# Altium PCB Underwater_ROV_PDB_17.PcbDoc
Units mm, origin at the board's own origin, x right, y up, seen from the top; angles counter-clockwise.
Board outline 180.98 x 100.84 mm, 2 copper layers (Top Layer, Bottom Layer), stack 0.325 mm thick; 42 components, 58 nets, 224 pads, 46 vias.
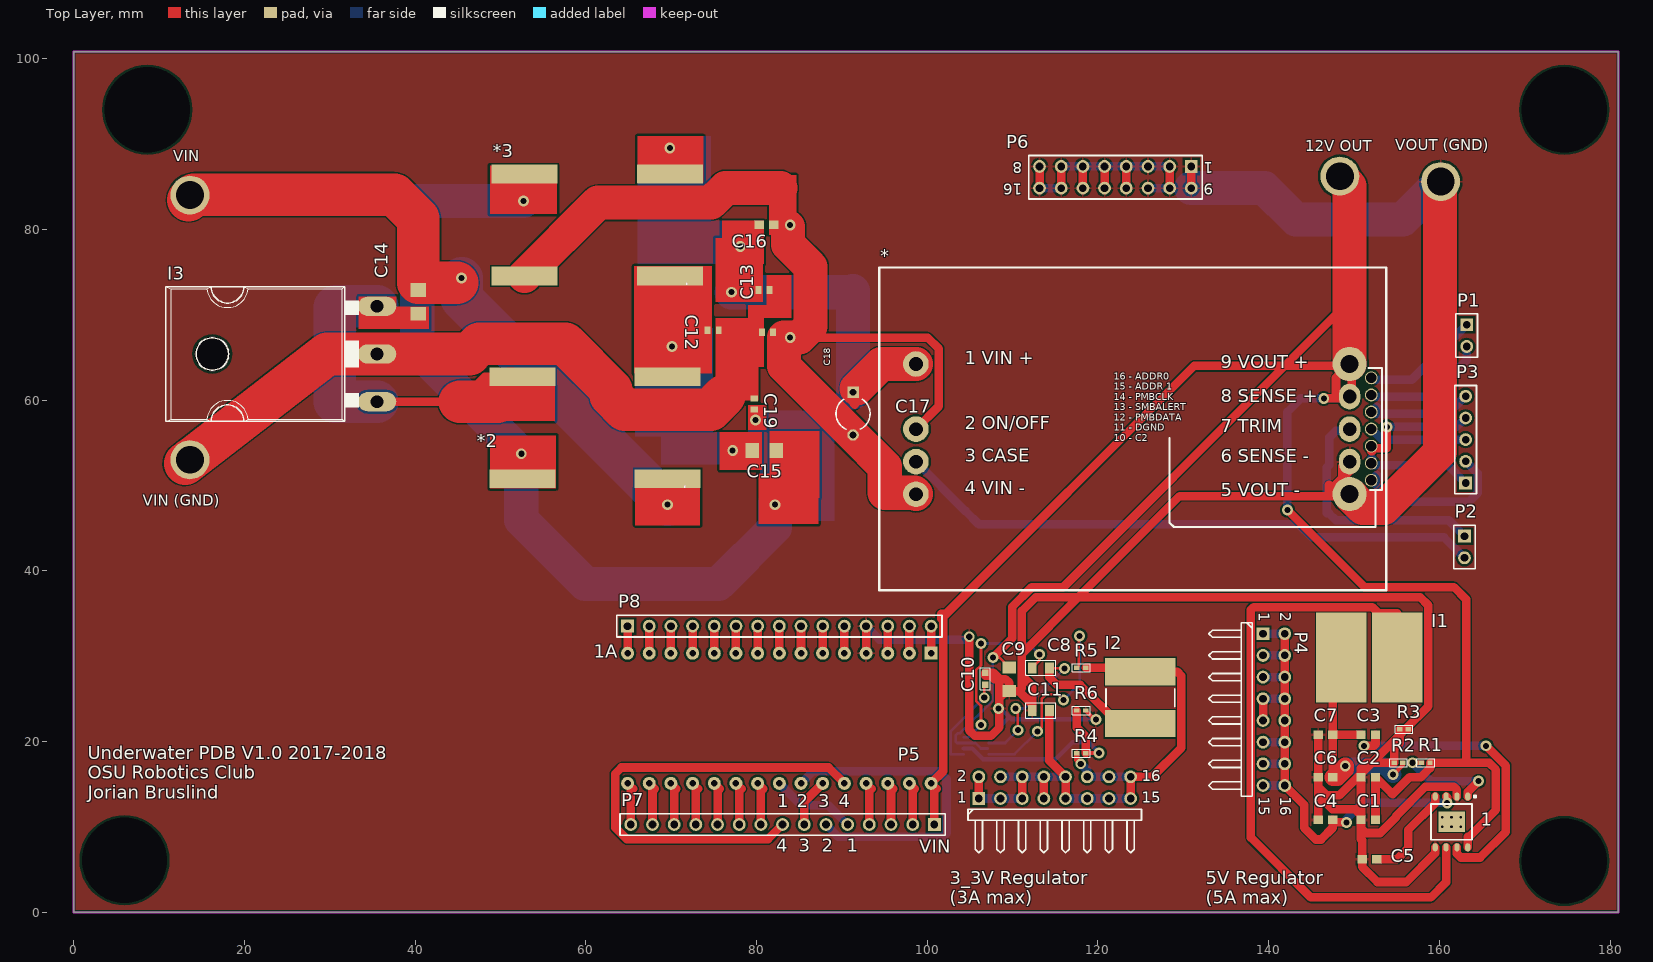
[diagram p0: Top Layer view]
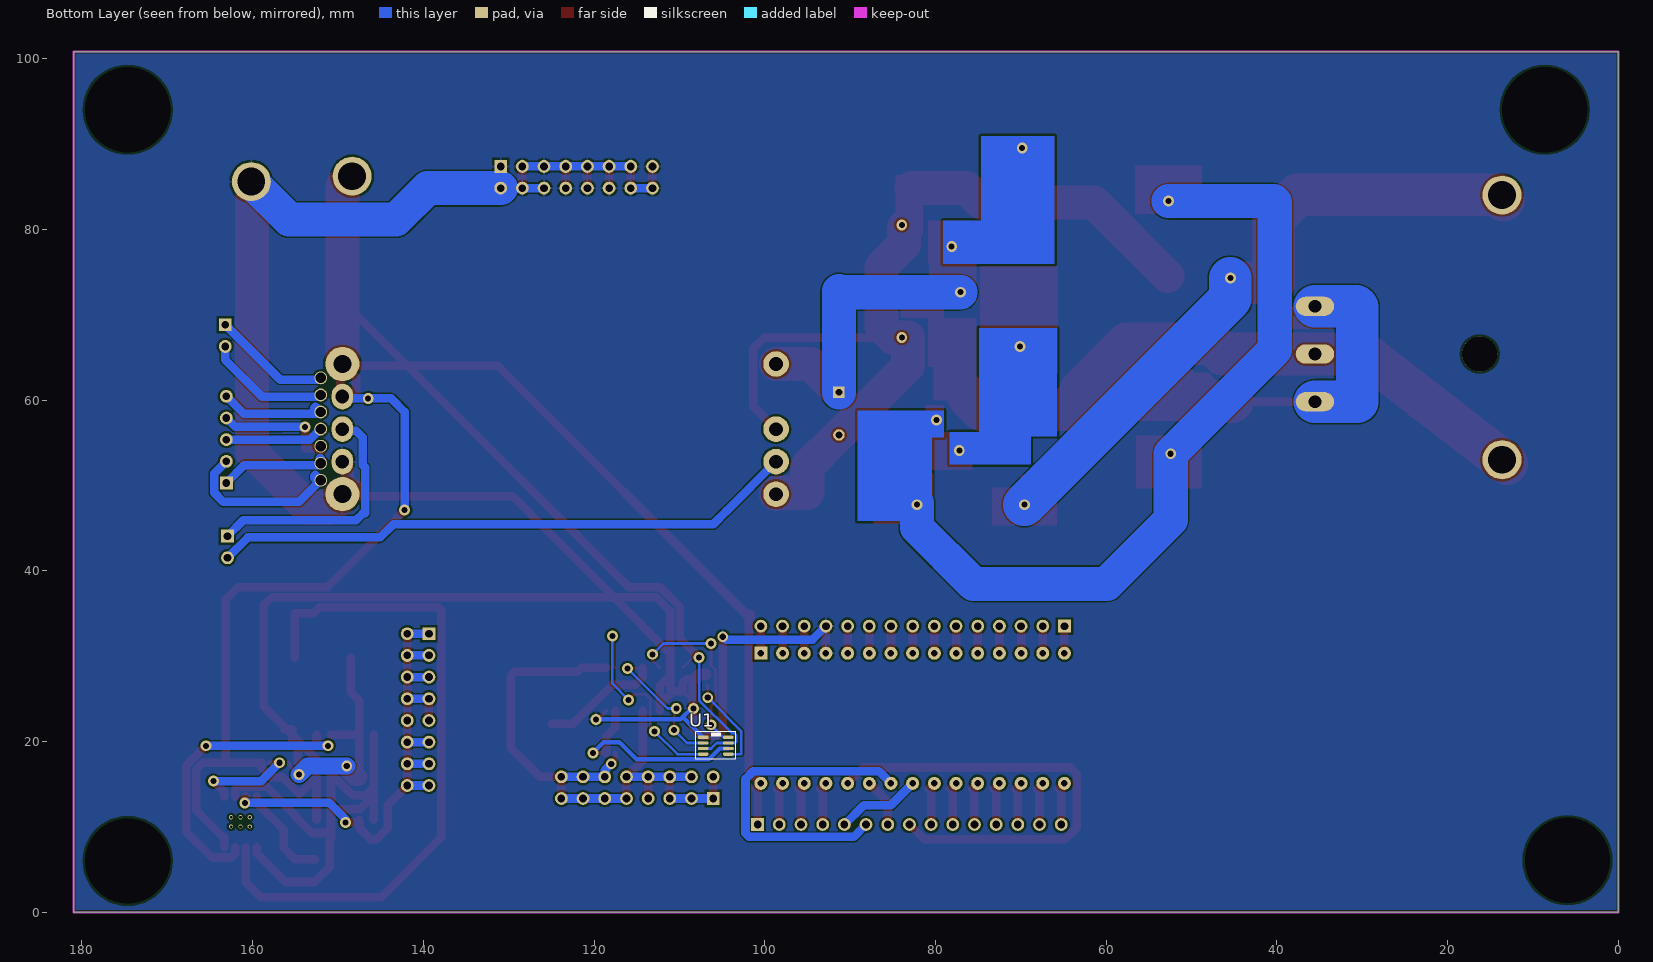
[diagram p1: Bottom Layer view, seen from below]

## Layer stack, top to bottom
Top Solder: solder mask 0.0102, Solder Resist, Dk 3.5
Top Layer: signal copper 0.0356
Dielectric 1: core 0.254, FR-4, Dk 4.2
Bottom Layer: signal copper 0.0356
Bottom Solder: solder mask 0.0102, Solder Resist, Dk 3.5

## Board outline
-0.002,100.838 180.975,100.838 180.975,0 -0.002,0

## Design rules (kind name [scope] priority, off if disabled: settings)
Clearance [All] p1: gap=0.154 ignorepadtopadclearanceinfootprint=TRUE except(0: Arc-Hole Track-Hole SMDPad-Hole THPad-Hole Via-Hole Fill-Hole Poly-Hole Region-Hole Text-Hole; 0.254: THPad-THPad THPad-Via THPad-Fill THPad-Poly THPad-Region THPad-Text Via-Via Via-Fill Via-Poly Via-Region Via-Text Fill-Fill Fill-Poly Fill-Region Fill-Text Poly-Poly Poly-Region Poly-Text Region-Region Region-Text Text-Text)
PolygonConnect [All] p1: connectstyle=Relief reliefconductorwidth=0.254 reliefentries=4 polygonreliefangle="90 Angle" airgapwidth=0.254
RoomDefinition "Current sensing" [InComponentClass('Current sensing')] p1: confinementstyle=ConfineIn formatcopy=TRUE lockcomponents=FALSE outline 58.547,35.941 58.547,6.223 102.743,6.223 102.743,35.941
RoomDefinition "12V Regulator" [InComponentClass('12V Regulator')] p2: confinementstyle=ConfineIn formatcopy=TRUE lockcomponents=FALSE outline 1.524,35.941 168.656,35.941 168.656,91.331 1.524,91.331
RoomDefinition "5V Regulator" [InComponentClass('5V Regulator')] p3: confinementstyle=ConfineIn formatcopy=TRUE lockcomponents=FALSE outline 168.529,35.941 132.251,35.941 132.251,1.016 168.529,1.016
RoomDefinition "3_3V Regulator" [InComponentClass('3_3V Regulator')] p4: confinementstyle=ConfineIn formatcopy=TRUE lockcomponents=FALSE outline 102.616,0.508 132.334,0.508 132.334,36.068 102.616,36.068
RoutingVias [All] p1: holewidth=0.711 width=1.27 viastyle="Through Hole" minholewidth=0.711 minwidth=1.27 maxholewidth=0.711 maxwidth=1.27
SolderMaskExpansion [All] p1: expansion=0.102
Width [All] p1: maxlimit=600 minlimit=0.3 preferedwidth=1 minimp=50.000000 maximp=50.000000 favimp=50.000000
30 further rules are at their usual default settings.

## Classes and differential pairs
component class "Current sensing": P8
component class "3_3V Regulator": C8 C9 C10 C11 I2 P5 R4 R5 R6 U1
component class "5V Regulator": 1 C1 C2 C3 C4 C5 C6 C7 I1 P4 R1 R2 R3
component class "12V Regulator": * *2 *3 C12 C13 C14 C15 C16 C17 C18 C19 I3 P1 P2 P3 P6 U2

## Components (designator, comment, footprint, x,y, rotation, side; value= is the part's Value field where it differs from the comment)
1 "TPS54627DDA" SOIC127P600X170_HS-9N 159.512,7.62 r270 top
1A "arduinoNano" "Arduino nano" 104.521,31.877 r180 top
* "Q48SC12033" PCBComponent_1 94.379,37.73 r0 top
*2 "PA2755NL" Makeni 61.087,56.769 r180 top
*3 "PA2755NL" Makeni 61.341,80.518 r180 top
C1 "CAP-11378" 0603 151.663,10.827 r180 top
C2 "CAP-11378" 0603 151.663,15.827 r180 top
C3 "100nF" 0603 151.663,20.827 r180 top
C4 "10.0uF" 0603 146.663,10.827 r180 top
C5 "100nF" 0603 151.787,6.223 r180 top
C6 "15.0pF" 0603 146.663,15.827 r180 top
C7 "CAP-11378" 0603 146.663,20.827 r180 top
C8 "100nF" 0805C-TBD 112.539,28.64 r0 top
C9 "10uF" EIA3216 109.601,27.305 r90 top
C10 "8.2nF" 0603C-GENERIC 106.807,26.67 r90 top
C11 "47uF" 0805C-TBD 112.539,23.64 r0 top
C12 "47nF" 0402-CAP 74.93,68.199 r180 top
C13 "47nF" 0402-CAP 80.899,72.898 r180 top
C14 "6.6uF" 1206 40.386,71.501 r270 top
C15 "6.6uF" 1206 80.899,54.102 r0 top
C16 "2.2uF" 0603 81.153,80.518 r0 top
C17 "Cap2" CAPR5-4X5 91.313,58.42 r270 top value=100pF
C18 "47nF" 0402-CAP 81.28,67.945 r180 top
C19 "47nF" 0402-CAP 79.756,59.563 r90 top
I1 "3.3uH" SRP1040 151.787,29.845 r180 top
I2 "SRN8040-2R2Y" SRN8040 124.968,25.146 r90 top
I3 "VS-65PQ015PBF" TO247AC 16.256,65.405 r90 top
P1 "Header 2" HDR1X2 163.195,68.834 r270 top
P2 "Header 2" HDR1X2 162.941,44.069 r270 top
P3 "Header 5" HDR1X5 163.068,50.292 r90 top
P4 "5V Header" HDR2X8H 139.341,32.639 r270 top
P5 "3_3V Header" HDR2X8H 106.045,13.335 r0 top
P6 "Header 8X2A" HDR2X8_CEN 130.937,87.376 r180 top
P7 "Header 15" HDR1X15 100.838,10.287 r180 top
P8 "Header 15" HDR1X15 64.897,33.528 r0 top
R1 "TBD" 0402R-TBD 158.899,17.526 r180 top
R2 "121k" 0402R-TBD 155.724,17.526 r180 top
R3 "22.1k" 0402R-TBD 156.359,21.463 r180 top
R4 "33.2k" 0402R-TBD 117.539,18.64 r0 top
R5 "100k" 0402R-TBD 117.539,28.64 r0 top
R6 "10.2k" 0402R-TBD 117.539,23.64 r0 top
U1 "TPS563210DDFT" SOT23-8 107.217,20.492 r180 bottom

## Footprints (in the part's own frame and the unit in brackets; to place one, negate y for a bottom-side part, rotate by r counter-clockwise, add the part's x,y. Pads: shape width x height; smd on the part's side, far side on the other; paste and mask are expansions set on the pad)
0402-CAP [mm]
  rect 0.7x0.9 smd: 1(-0.65,0) 2(0.65,0)
0402R-TBD [mil]
  rect 25x20 smd: 1(0,0) 2(40,0)
  silkscreen extent -21,-19 61,19, body extent -6,-10 46,10, height 14
0603 [mm]
  rect 1.1x1 smd: 1(-0.85,0) 2(0.85,0)
0603C-GENERIC [mil] "CAPACITOR 0603"
  rect 30x30 smd: 1(0,0) 2(55,0)
  silkscreen extent -23,-23 78,23, body extent -4,-15 59,15, height 19
0805C-TBD [mil] "CAPACITOR 0805"
  rect 40x50 smd: 1(-10,0) 2(70,0)
  silkscreen extent -40,-35 100,35, body extent -11,-25 70,25, height 26
1206 [mm]
  rect 1.6x1.8 smd: 1(-1.4,0) 2(1.4,0)
"Arduino nano" [mil] "arduino nano"
  rect 60x60 hole 30: 0(160,60)
  round 60 hole 30: 1(260,60) 2(360,60) 3(460,60) 4(560,60) 5(660,60) 6(760,60) 7(860,60) 8(960,60) 9(1060,60) 10(1160,60) 11(1260,60) 12(1360,60) 13(1460,60) 14(1560,60) 15(1560,660) 16(1460,660) 17(1360,660) 18(1260,660) 19(1160,660) 20(1060,660) 21(960,660) 22(860,660) 23(760,660) 24(660,660) 25(560,660) 26(460,660) 27(360,660) 28(260,660) 29(160,660)
CAPR5-4X5 [mm] "Capacitor; 2 Leads"
  rect 1.35x1.35 hole 0.8: 1(-2.5,0)
  round 1.35 hole 0.8: 2(2.5,0)
  silkscreen extent -1.69,-2 1.82,2
EIA3216 [mm]
  rect 1.4x1.6 smd: A(1.4,0) C(-1.4,0)
HDR1X2 [mm] "Connector; Header; 2 Position"
  rect 1.5x1.5 hole 0.9: 1(0,0)
  round 1.5 hole 0.9: 2(2.54,0)
  silkscreen extent -1.27,-1.27 3.81,1.27
HDR1X5 [mm] "Connector; Header; 5 Position"
  rect 1.5x1.5 hole 0.9: 1(0,0)
  round 1.5 hole 0.9: 2(2.54,0) 3(5.08,0) 4(7.62,0) 5(10.16,0)
  silkscreen extent -1.27,-1.27 11.43,1.27
HDR1X15 [mm] "Connector; Header; 15 Position"
  rect 1.5x1.5 hole 0.9: 1(0,0)
  round 1.5 hole 0.9: 2(2.54,0) 3(5.08,0) 4(7.62,0) 5(10.16,0) 6(12.7,0) 7(15.24,0) 8(17.78,0) 9(20.32,0) 10(22.86,0) 11(25.4,0) 12(27.94,0) 13(30.48,0) 14(33.02,0) 15(35.56,0)
  silkscreen extent -1.27,-1.27 36.83,1.27
HDR2X8_CEN [mm] "Connector; Header; 8x2 Position"
  rect 1.5x1.5 hole 0.9: 1(0,0)
  round 1.5 hole 0.9: 2(2.54,0) 3(5.08,0) 4(7.62,0) 5(10.16,0) 6(12.7,0) 7(15.24,0) 8(17.78,0) 9(0,2.54) 10(2.54,2.54) 11(5.08,2.54) 12(7.62,2.54) 13(10.16,2.54) 14(12.7,2.54) 15(15.24,2.54) 16(17.78,2.54)
  silkscreen extent -1.27,-1.27 19.05,3.81
HDR2X8H [mm] "Connector; Header; 8x2 Position; Right Angle"
  rect 1.5x1.5 hole 0.9: 1(0,0)
  round 1.5 hole 0.9: 2(0,2.54) 3(2.54,0) 4(2.54,2.54) 5(5.08,0) 6(5.08,2.54) 7(7.62,0) 8(7.62,2.54) 9(10.16,0) 10(10.16,2.54) 11(12.7,0) 12(12.7,2.54) 13(15.24,0) 14(15.24,2.54) 15(17.78,0) 16(17.78,2.54)
  silkscreen extent -1.27,-6.35 19.05,-1.27
Makeni [mm] "DFN, 4-Leads, Body 12.50x20.50mm, Pitch 17.02mm, IPC Medium Density"
  rect 7.75x2.2 smd: 1(-8.51,5.97) 2(-8.51,-5.97) 3(8.51,-5.97) 4(8.51,5.97)
  silkscreen extent -10.55,6.85 -10.45,6.95, body extent -10.5,-6.5 10.5,6.5, height 11.2
PCBComponent_1 [mm]
  round 3 hole 1.6: 1(4.3,26.5) 2(4.3,18.88) 3(4.3,15.07) 4(4.3,11.26)
  round 4 hole 2.1: 5(55.1,11.26) 9(55.1,26.5)
  oval 2.5x3 hole 1.6: 6(55.1,15.07) 7(55.1,18.88) 8(55.1,22.69)
  round 1.5 hole 1.2: 10(57.64,12.88) 11(57.64,14.88) 12(57.64,16.88) 13(57.64,18.88) 14(57.64,20.88) 15(57.64,22.88) 16(57.64,24.88)
  silkscreen extent 0,0 59.4,37.8
SOIC127P600X170_HS-9N [mm] "SOIC, 8-Leads, Body 4.90x4.90mm, Pitch 1.27mm, Thermal Pad 3.10x2.40mm, IPC Medium Density"
  oval 0.95x0.6 smd: 1(-5.95,3.81) 2(-5.95,2.54) 3(-5.95,1.27) 4(-5.95,0) 5(0,0) 6(0,1.27) 7(0,2.54) 8(0,3.81)
  rect 2.4x3.1 smd: 9(-2.975,1.905)
  silkscreen extent -6.07,-0.49 -0.87,4.79, body extent -6.11,-0.5 0.16,4.31, height 1.85
SOT23-8 [mm]
  rect 1.27x0.4 smd: 1(0,0)
  oval 1.27x0.4 smd: 2(0,-0.65) 3(0,-1.3) 4(0,-1.95) 5(2.95,-1.95) 6(2.95,-1.3) 7(2.95,-0.65) 8(2.946,0)
  silkscreen extent -0.89,-2.58 3.84,0.64, body extent 0.25,-2.44 2.69,0.48, height 1.33
SRN8040 [mm] "Chip Inductor, 2-Leads, Body 8.20x8.15mm, IPC Medium Density"
  rect 3.2x8.27 smd: 1(-3.03,0) 2(3.03,0)
  silkscreen extent -1.05,-4.03 1.05,4.03, body extent -4.05,-4.1 4.05,4.1, height 4
SRP1040 [mm] "Chip Inductor, 2-Leads, Body 11.00x10.00mm, IPC Medium Density"
  rect 5.94x10.51 smd: 1(-3.28,0) 2(3.28,0)
  body extent -5.9,-5.25 5.9,5.25, height 4.2
TO247AC [mil]
  oval 88.5x177 hole 59: 1(-220,-760) 2(0,-760) 3(220,-760)
  round 162 hole 162 unplated: None(0,0)
  silkscreen extent -310,-676 310,215

## Part data
1: "IC REG BUCK ADJ 6A SYNC 8SOPWR", Base Part Number=TPS54627, Current - Output=6A, Frequency - Switching=650kHz, Manufacturer="Texas Instruments", Operating Temperature="-40°C ~ 85°C (TA)", Package / Case="8-PowerSOIC (0.154\", 3.90mm Width)", Supplier Device Package="8-SO PowerPad", Supplier Part Number 1=296-36192-5-ND, Voltage - Input (Max)=18V, Voltage - Input (Min)=4.5V, Voltage - Output (Max)=5.5V, Voltage - Output (Min/Fixed)=0.765V, Category="Integrated Circuits (ICs)", ComponentLink1Description=http://www.ti.com/lit/ds/symlink/tps54627.pdf, ComponentLink1URL=http://www.ti.com/lit/ds/symlink/tps54627.pdf, Function=Step-Down, Manufacturer Part Number=TPS54627DDA, Mounting Type="Surface Mount", Number of Outputs=1, Output Configuration=Positive, Output Type=Adjustable, Packaging=Tube, Part Status=Active, Pricing 1="1=2.94, 10=2.639, 100=2.1626, 500=1.84094, 1000=1.5526 (USD)", RoHS="RoHS Compliant", Stock 1=282, Supplier 1=Digi-Key, Synchronous Rectifier=Yes, Topology=Buck
*2 *3: "COMMON MODE CHOKE 14A 2LN SMD", Current Rating (Max)=14A, DC Resistance (DCR) (Max)="1.95 mOhm", Manufacturer="Pulse Electronics Power", Operating Temperature="-40°C ~ 130°C", Package / Case="Horizontal, 4 PC Pad", Ratings=-, Supplier Part Number 1=553-2193-ND, Approvals=-, Category=Filters, ComponentLink1Description=http://productfinder.pulseeng.com/products/datasheets/P688.pdf, ComponentLink1URL=http://productfinder.pulseeng.com/products/datasheets/P688.pdf, Features=-, Filter Type=-, Height (Max)="0.440\" (11.18mm)", Manufacturer Part Number=PA2755NL, Mounting Type="Surface Mount", Number of Lines=2, Packaging=Tube, Part Status=Active, Pricing 1="1=3.45, 10=3.163, 100=2.07, 500=1.84, 1000=1.725, 2500=1.6675 (USD)", RoHS="RoHS Compliant", Size / Dimension="0.750\" L x 0.815\" W (19.05mm x 20.70mm)", Stock 1=1352, Supplier 1=Digi-Key, Voltage Rating - AC=-, Voltage Rating - DC=-
C1 C2 C3 C4 C5 C6 C7: library part 4.7NF-50V-10%(0603), PROD_ID=CAP-11378
C8 C11: library part 0603C-2U2-6V3-X5R-PAN, "CAPACITOR 0805 CERAMIC", Manufacturer="Panasonic - ECG", Manufacturer Part Number=ECJ-1VB0J225K, Supplier Part Number 1=PCC2273TR-ND, Supplier 1=Digi-Key
C9: library part 10UF-TANT, PROD_ID=CAP-00811
C10: library part 0603C-000, "CAPACITOR 0603 CERAMIC"
C12 C13 C18 C19: library part 2.2UF-CERCAP-07888, PROD_ID=CAP-07888
C14 C15: library part 2.2UF-CERCAP-10009, PROD_ID=CAP-10009
C16: library part 1.5PF-0603-50V-16.667%, PROD_ID=CAP-08763
C17: "Capacitor", PackageDescription="Capacitor; 2 Leads", PackageReference=CAPR5-4X5, Published=23-Sep-2002, Publisher="Altium Limited"
I1: library part SRP1040-3R3M, "FIXED IND 3.3UH 10A 10 MOHM SMD", DC Resistance (DCR)="10 mOhm Max", Manufacturer="Bourns Inc.", Operating Temperature="-55°C ~ 150°C", Package / Case=Nonstandard, Q @ Freq=-, Supplier Part Number 1=SRP1040-3R3MCT-ND, Tolerance=±20%, Category="Inductors, Coils, Chokes", ComponentLink1Description=http://www.bourns.com/docs/Product-Datasheets/SRP1040.pdf, ComponentLink1URL=http://www.bourns.com/docs/Product-Datasheets/SRP1040.pdf, Height - Seated (Max)="0.165\" (4.20mm)", Manufacturer Part Number=SRP1040-3R3M, Material - Core=Iron, Mounting Type="Surface Mount", Packaging="Cut Tape (CT)", Part Status=Active, Pricing 1="1=1.43, 10=1.32, 100=0.9237 (USD)", Ratings=-, RoHS="RoHS Compliant", Shielding=Shielded, Size / Dimension="0.465\" L x 0.413\" W (11.80mm x 10.50mm)", Stock 1=575, Supplier 1=Digi-Key, Supplier Device Package=-, Type=-
I2: "FIXED IND 2.2UH 6.3A 13 MOHM SMD", DC Resistance (DCR)="13 mOhm Max", Manufacturer="Bourns Inc.", Operating Temperature="-40°C ~ 125°C", Package / Case=Nonstandard, Q @ Freq="13 @ 7.96MHz", Ratings=-, Supplier Part Number 1=SRN8040-2R2YCT-ND, Tolerance=±30%, Category="Inductors, Coils, Chokes", ComponentLink1Description=http://www.bourns.com/docs/Product-Datasheets/SRN8040.pdf, ComponentLink1URL=http://www.bourns.com/docs/Product-Datasheets/SRN8040.pdf, Height - Seated (Max)="0.157\" (4.00mm)", Manufacturer Part Number=SRN8040-2R2Y, Material - Core=Ferrite, Mounting Type="Surface Mount", Packaging="Cut Tape (CT)", Part Status=Active, Pricing 1="1=0.63, 10=0.547, 100=0.391, 500=0.32844 (USD)", RoHS="RoHS Compliant", Shielding=Semi-Shielded, Size / Dimension="0.315\" L x 0.315\" W (8.00mm x 8.00mm)", Stock 1=10441, Supplier 1=Digi-Key, Supplier Device Package=-, Type=Wirewound
I3: "DIODE SCHOTTKY 15V 65A TO247AC", Capacitance @ Vr, F=-, Current - Average Rectified (Io)=65A, Manufacturer="Vishay Semiconductor Diodes Division", Operating Temperature - Junction="-55°C ~ 125°C", Package / Case=TO-247-3, Supplier Device Package=TO-247AC, Supplier Part Number 1=65PQ015PBF-ND, Category="Discrete Semiconductor Products", ComponentLink1Description=http://www.vishay.com/docs/94246/vs-65pq015p.pdf, ComponentLink1URL=http://www.vishay.com/docs/94246/vs-65pq015p.pdf, Diode Type=Schottky, Manufacturer Part Number=VS-65PQ015PBF, Mounting Type="Through Hole", Packaging=Tube, Part Status=Active, Pricing 1="1=4.17, 10=3.749, 25=3.5436, 100=3.0713, 250=2.91376, 500=2.6145, 1000=2.205 (USD)", RoHS="RoHS Compliant", Speed="Fast Recovery =< 500ns, > 200mA (Io)", Stock 1=478, Supplier 1=Digi-Key
P1 P2: "Header, 2-Pin", LatestRevisionDate=17-Jul-2002, LatestRevisionNote="Re-released for DXP Platform.", Publisher="Altium Limited"
P3: "Header, 5-Pin", LatestRevisionDate=17-Jul-2002, LatestRevisionNote="Re-released for DXP Platform.", Publisher="Altium Limited"
P4 P5: library part "Header 8X2H", "Header, 8-Pin, Dual row, Right Angle", LatestRevisionDate=17-Jul-2002, LatestRevisionNote="Re-released for DXP Platform.", Publisher="Altium Limited"
P6: "Header, 8-Pin, Dual row", LatestRevisionDate=17-Jul-2002, LatestRevisionNote="Re-released for DXP Platform.", Publisher="Altium Limited"
P7 P8: "Header, 15-Pin", LatestRevisionDate=17-Jul-2002, LatestRevisionNote="Re-released for DXP Platform.", Publisher="Altium Limited"
R1 R2 R3 R4 R5 R6: library part 0402R-TBD, "RESISTOR 0402 VALUE TO BE DETERMINED"
U1: "TEXAS INSTRUMENTS - TPS563210DDFT - DC/DC CONV, SYNC BUCK, 650KHZ, SOT-23-8", DC / DC Converter IC Case=SOT-23, Input Voltage Max=17, Input Voltage Min=4.5, Manufacturer="TEXAS INSTRUMENTS", Output Current=3, Supplier Part Number 1=51Y5695, ComponentLink1Description=http://www.ti.com/general/docs/lit/getliterature.tsp?genericPartNumber=TPS563210&amp;&amp;fileType=pdf, ComponentLink1URL=http://www.ti.com/general/docs/lit/getliterature.tsp?genericPartNumber=TPS563210&amp;&amp;fileType=pdf, Manufacturer Part Number=TPS563210DDFT, No. of Outputs=1, No. of Pins=8, Pricing 1="1=1.92, 10=1.63, 25=1.52, 50=1.41, 100=1.3 (USD)", RoHS=YES, Stock 1=60, Supplier 1=Newark, Topology="Synchronous Buck (Step Down)"

## Free pads (board coordinates)
  round 4.572 hole 3.26: 2(13.634,53.016) 2(13.634,84.016) 2(148.336,86.233) 2(160.147,85.598)
  round 1.524 hole 10: 3(5.969,6.096) 4(8.634,94.016) 4(174.634,6.016) 4(174.634,94.016)

## Via types
v1: diameter 1.27, hole 0.711, Top Layer to Bottom Layer, 40 vias
v2: diameter 0.5, hole 0.31, Top Layer to Bottom Layer, 6 vias

## Nets (pads, with @x,y where several pads share a name; then routed paths per layer and width w, separated by ;. In a path a pad name is that pad's centre, name@x,y a point inside that pad or via, vN(x,y) a via of type N, cw(c..) or ccw(c..) an arc to the next point about the centre after c; other vN are vias at no path point)
3_3V: C11.2 I2.2 P5.1 P5.2 P5.3 P5.4 P5.5 P5.6 P5.7 P5.8 P5.9 P5.10 P5.11 P5.12 P5.13 P5.14 P5.15 P5.16 R4.1 R5.2 | length 77.3
  Top Layer w0.635: R4.1 117.539,17.843 v1(117.983,17.399)
  Top Layer w1: P5.1 P5.2 ; P5.5 P5.6 ; P5.7 P5.8 ; C11.2 114.317,17.763 P5.10 P5.9 ; R5.2 121.514,28.64 121.978,28.176 I2.2 129.279,28.176 129.769,27.686 129.769,19.279 126.365,15.875 P5.16 P5.15
  Bottom Layer w1: P5.1 P5.3 P5.5 ; P5.4 P5.6 P5.8 P5.10 ; P5.9 P5.11 P5.13 P5.15 ; v1(117.983,17.399) 118.745,16.637 P5.12 P5.14 P5.16
5V: C3.2 C6.1 C7.1 I1.2 R2.1 | length 27.9
  Top Layer w0.508: v1(154.559,16.129) 154.595,16.129 155.724,17.258 R2.1
  Top Layer w1: C6.1 C7.1 ; I1.2 148.507,25.81 147.513,24.816 C7.1 ; C3.2 C7.1
  Top Layer w2: C6.1@147.517,15.827 148.057,15.827 148.971,16.741 v1(148.971,17.145)
  Bottom Layer w2: v1(148.971,17.145) 153.543,17.145 v1(154.559,16.129)
12V: 1.8 1A.29 *.8 *.9 C1.1 C2.1 C9.A P7.1 pad.2@148.336,86.233 R1.1 U1.3 U1.7 | length 300
  Top Layer w0.305: v1(107.696,29.845) 108.461,29.845 C9.A
  Top Layer w1: P7.1 100.838,14.199 101.105,14.465 1A.29 101.879,16.535 101.879,34.62 ; v1(107.696,29.845) 109.946,32.095 109.946,35.784 112.247,38.086 115.937,38.086 141.859,64.008 ; v1(142.189,47.117) 151.206,38.1 161.696,38.1 163.119,36.678 163.119,17.526 ; v1(146.456,60.198) 149.733,60.198 *.9@149.733,62.941 ; *.8 148.209,60.42 147.885,60.744 147.885,62.636 *.9@149.257,64.008 ; 149.479,70.485 148.336,70.485 141.859,64.008 ; C1.1 C2.1 154.37,13.97 ; R1.1 R1.1@158.902,17.526 ; 1.8 163.322,8.839 163.449,8.839 166.613,12.003 166.613,16.718 165.805,17.526 163.119,17.526 ; 101.879,34.62 131.267,64.008 141.859,64.008 ; 101.879,34.62 101.625,34.366 101.625,34.95 101.879,34.95 101.879,34.62 ; 141.859,64.008 *.9@149.257,64.008 ; *.9@149.257,64.008 *.9@149.479,64.008 ; *.9@149.257,64.008 *.9 *.9@149.479,64.008 ; *.9@149.479,64.008 149.733,64.008 *.9@149.733,62.941 ; *.9@149.479,64.008 149.479,62.941 *.9@149.733,62.941 ; 154.37,13.97 154.51,13.83 154.65,13.97 ; 154.37,13.97 154.65,13.97 ; 154.65,13.97 156.507,15.827 157.838,15.827 158.902,16.891 R1.1@158.902,17.526 ; R1.1@158.902,17.526 163.119,17.526
  Top Layer w4: pad.2@148.336,86.233 149.479,85.09 149.479,70.485 *.9
  Bottom Layer w0.305: 103.505,19.841 103.329,20.017 103.329,20.702 103.626,20.998 103.864,20.998 107.696,24.831 v1(107.696,29.845) ; 103.505,19.842 U1.7 105.634,19.842 106.284,19.192 U1.3@107.09,19.192
  Bottom Layer w1: v1(142.189,47.117) 142.189,58.623 143.764,60.198 v1(146.456,60.198) *.8@149.733,60.198
ADDR0: *.16 P1.1 | length 14.1
  Bottom Layer w1: *.16 152.273,62.61 152.273,62.388 156.749,62.388 P1.1
ADDR1: *.15 P1.2 | length 14.8
  Bottom Layer w1: *.15 152.273,60.61 152.273,60.388 158.877,60.388 163.195,64.706 P1.2
CASE: *.3 P2.2 | length 68.9
  Bottom Layer w1: *.3 104.464,47.015 104.496,47.015 106.045,45.466 143.51,45.466 145.059,43.917 160.553,43.917 P2.2
CLOCK: *.14 P3.5 | length 13.6
  Bottom Layer w1: *.14 152.642,59.233 152.756,59.119 152.756,58.871 152.273,58.388 161.004,58.388 P3.5
DATA: *.12 P3.4 | length 14.9
  Top Layer w1: *.12 152.019,54.026 152.146,54.026 152.146,54.388 153.848,54.388 v1(153.848,56.871)
  Bottom Layer w1: v1(153.848,56.871) 156.337,56.871 156.362,56.896 162.052,56.896 P3.4
DGND: *.11 P3.1 | length 13.3
  Bottom Layer w1: *.11 152.019,53.188 152.146,53.188 152.146,52.388 160.972,52.388 P3.1
GND: 1.2 1.5 1A.3 *.5 *.6 C1.2 C2.2 C4.2 C5.2 C6.2 C7.2 C9.C C10.2 C11.1 P6.1 P6.2 P6.3 P6.4 P6.5 P6.6 P6.7 P6.8 P6.9 P6.10 P6.11 P6.12 P6.13 P6.14 P6.15 P6.16 P8.12 pad.2@160.147,85.598 R2.2 R3.1 R3.2 R6.2 U1.1 | length 399.8
  Top Layer w0.508: v1(108.331,23.876) 108.331,24.635 108.458,24.762 C9.C ; R6.2 119.589,22.606 v1(119.761,22.606)
  Top Layer w1: 1A.3 P8.12 ; v1(104.927,32.283) 104.927,21.336 105.588,20.676 107.467,20.676 108.458,21.666 108.458,24.762 108.458,27.33 ; C11.1 112.285,24.364 ; P6.16 P6.8 ; P6.15 P6.7 ; P6.14 P6.6 ; P6.13 P6.5 ; P6.12 P6.4 ; P6.10 P6.2 ; P6.9 P6.1 ; C4.2 145.813,13.716 ; C7.2 C6.2 145.813,14.664 ; *.5 149.479,50.343 148.793,51.029 ; R3.1 156.032,21.463 ; 1.5 159.512,6.934 156.134,3.556 152.73,3.556 150.937,5.349 C5.2 150.937,8.458 150.813,8.582 150.813,9.867 ; 1.2 162.052,14.351 161.671,14.732 158.369,14.732 154.94,11.303 154.94,11.176 153.06,9.296 151.384,9.296 150.813,9.867 ; 108.458,27.33 108.458,27.356 107.747,28.067 C10.2 106.807,27.711 107.467,27.711 107.848,27.33 108.458,27.33 ; 108.458,27.33 109.156,27.33 109.601,26.886 C9.C 110.744,25.905 ; 110.744,25.905 111.1,26.261 111.1,27.754 ; 110.744,25.905 112.285,24.364 ; 111.1,27.754 112.285,26.568 112.285,24.364 ; 111.1,27.754 111.1,30.302 ; 111.1,30.302 111.1,35.306 112.725,36.932 117.729,36.932 ; 111.1,30.302 117.729,36.932 ; 117.729,36.932 129.565,48.768 *.5@148.361,48.768 ; 117.729,36.932 157.734,36.932 158.699,35.966 158.699,24.13 156.032,21.463 ; 145.813,13.716 147.464,12.065 150.114,12.065 150.813,11.366 ; 145.813,13.716 145.813,14.664 ; 145.813,14.664 146.761,13.716 148.285,13.716 C2.2@150.813,16.244 ; 147.447,49.682 148.793,51.029 ; 147.447,49.682 147.066,49.301 147.066,50.063 147.447,49.682 ; 147.447,49.682 *.5@148.361,48.768 ; *.5@148.361,48.768 149.733,48.768 149.733,48.68 149.733,47.396 *.5@148.361,48.768 ; 148.793,51.029 148.615,51.206 148.615,52.248 149.479,53.111 *.6 149.479,52.578 149.733,52.578 149.733,51.968 148.793,51.029 ; 150.813,9.867 C1.2 150.813,11.366 ; 150.813,11.366 C2.2 C2.2@150.813,16.244 ; C2.2@150.813,16.244 150.813,16.891 151.448,17.526 152.095,17.526 ; C2.2@150.813,16.244 152.095,17.526 ; 152.095,17.526 155.343,20.774 ; 152.095,17.526 R2.2 154.708,19.177 155.343,19.812 155.343,20.774 ; 155.343,20.774 156.032,21.463 ; 155.343,20.774 R3.2 156.032,21.463
  Top Layer w4: *.5@149.733,48.768 149.689,48.724 149.733,48.68 151.029,47.384 153.517,47.384 160.064,53.931 160.064,85.598 pad.2@160.147,85.598
  Bottom Layer w0.508: U1.1 109.601,22.876 ; v1(108.331,23.876) 108.601,23.876 109.601,22.876 ; v1(119.761,22.606) 109.871,22.606 109.601,22.876
  Bottom Layer w1: P8.12 94.412,31.953 104.597,31.953 v1(104.927,32.283) ; P6.16 P6.15 ; P6.7 P6.6 P6.5 P6.4 P6.3 P6.2 ; P6.11 P6.10 P6.9
  Bottom Layer w4: P6.9 139.517,84.836 143.195,81.158 155.707,81.158 pad.2@160.147,85.598
Net1_1: 1.1 R1.2 | length 11
  Top Layer w1: 1.1 163.322,14.097 v1(164.592,15.367)
  Bottom Layer w1: v1(156.845,17.526) 159.004,15.367 v1(164.592,15.367)
Net1_3: 1.3 C4.1 P4.1 P4.2 P4.3 P4.4 P4.5 P4.6 P4.7 P4.8 P4.9 P4.10 P4.11 P4.12 P4.13 P4.14 P4.15 P4.16 | length 64.9
  Top Layer w1: P4.9 P4.7 ; P4.2 P4.4 P4.6 P4.8 P4.10 P4.12 P4.14 P4.16 144.145,12.595 144.145,9.906 145.517,8.534 146.141,8.534 147.513,9.906 C4.1 147.799,10.541 v1(149.098,10.541) ; 1.3 160.898,13.454 160.898,12.838 v1(160.909,12.827)
  Bottom Layer w1: P4.15 P4.16 ; P4.13 P4.14 ; P4.11 P4.12 ; P4.7 P4.8 ; P4.5 P4.6 ; P4.3 P4.4 ; P4.1 P4.2 ; v1(149.098,10.541) 149.098,10.922 151.003,12.827 v1(160.909,12.827)
Net1_4: 1.4 C5.1 | length 11.6
  Top Layer w1: C5.1 155.016,6.223 156.331,7.538 156.331,9.646 159.512,12.827 1.4
Net1_6: 1.6 I1.1 | length 80.1
  Top Layer w1: I1.1 155.067,35.052 152.832,35.052 152.121,35.763 138.227,35.763 137.922,35.458 137.922,8.763 144.932,1.753 159.004,1.753 160.782,3.531 1.6
Net1_7: 1.7 C3.1 | length 35.8
  Top Layer w1: v1(151.155,19.507) 152.335,19.507 152.513,19.685 C3.1 ; 1.7 162.052,6.871 162.496,6.426 164.77,6.426 167.767,9.423 167.767,17.196 v1(165.456,19.507)
  Bottom Layer w1: v1(151.155,19.507) v1(165.456,19.507)
Net1A_0: 1A.0 P8.15 | length 3.2
  Top Layer w1: 1A.0 P8.15
Net1A_1: 1A.1 P8.14 | length 3.2
  Top Layer w1: 1A.1 P8.14
Net1A_2: 1A.2 P8.13 | length 3.2
  Top Layer w1: 1A.2 P8.13
Net1A_4: 1A.4 P8.11 | length 3.2
  Top Layer w1: 1A.4 P8.11
Net1A_5: 1A.5 P8.10 | length 3.2
  Top Layer w1: 1A.5 P8.10
Net1A_6: 1A.6 P8.9 | length 3.2
  Top Layer w1: 1A.6 P8.9
Net1A_7: 1A.7 P8.8 | length 3.2
  Top Layer w1: 1A.7 P8.8
Net1A_8: 1A.8 P8.7 | length 3.2
  Top Layer w1: 1A.8 P8.7
Net1A_9: 1A.9 P8.6 | length 3.2
  Top Layer w1: 1A.9 P8.6
Net1A_10: 1A.10 P8.5 | length 3.2
  Top Layer w1: 1A.10 P8.5
Net1A_11: 1A.11 P8.4 | length 3.2
  Top Layer w1: 1A.11 P8.4
Net1A_12: 1A.12 P8.3 | length 3.2
  Top Layer w1: 1A.12 P8.3
Net1A_13: 1A.13 P8.2 | length 3.2
  Top Layer w1: 1A.13 P8.2
Net1A_14: 1A.14 P8.1 | length 3.2
  Top Layer w1: 1A.14 P8.1
Net1A_15: 1A.15 P7.15 | length 5.2
  Top Layer w1: 1A.15 65.545,14.465 65.278,14.199 P7.15
Net1A_16: 1A.16 P7.14 | length 5.2
  Top Layer w1: 1A.16 68.085,14.465 67.818,14.199 P7.14
Net1A_17: 1A.17 P7.13 | length 5.2
  Top Layer w1: 1A.17 70.625,14.465 70.358,14.199 P7.13
Net1A_18: 1A.18 P7.12 | length 5.2
  Top Layer w1: 1A.18 73.165,14.465 72.898,14.199 P7.12
Net1A_19: 1A.19 P7.11 | length 5.2
  Top Layer w1: 1A.19 75.705,14.465 75.438,14.199 P7.11
Net1A_20: 1A.20 P7.10 | length 5.2
  Top Layer w1: 1A.20 78.245,14.465 77.978,14.199 P7.10
Net1A_21: 1A.21 P7.9 | length 5.2
  Top Layer w1: 1A.21 80.785,14.465 80.518,14.199 P7.9
Net1A_22: 1A.22 P7.5 | length 10
  Bottom Layer w1: 1A.22 85.242,12.548 88.417,12.548 P7.5
Net1A_23: 1A.23 P7.6 | length 39.2
  Bottom Layer w1: 1A.23 86.639,16.535 101.346,16.535 102.26,15.621 102.26,9.271 101.854,8.865 89.56,8.865 P7.6
Net1A_24: 1A.24 P7.7 | length 5.7
  Top Layer w1: P7.7 85.598,12.954 1A.24
Net1A_25: 1A.25 P7.8 | length 55.1
  Top Layer w1: P7.8 81.356,8.585 64.795,8.585 63.475,9.906 63.475,16.256 64.186,16.967 88.443,16.967 1A.25
Net1A_26: 1A.26 P7.4 | length 5.2
  Top Layer w1: 1A.26 93.485,14.465 93.218,14.199 P7.4
Net1A_27: 1A.27 P7.3 | length 5.2
  Top Layer w1: 1A.27 96.025,14.465 95.758,14.199 P7.3
Net1A_28: 1A.28 P7.2 | length 5.2
  Top Layer w1: 1A.28 98.565,14.465 98.298,14.199 P7.2
Net*2_2: *2.2 *3.1 C12.2 C15.1 | length 6.1
  Top Layer w1: *2.2 71.247,62.739 71.247,65.786 70.739,66.294 v1(70.104,66.294)
  other v1: 77.216,54.102
Net*2_3: *2.3 C14.2 I3.1 I3.3 | length 45.8
  Top Layer w1: I3.1 45.262,59.817 48.184,62.739 *2.3
  Top Layer w5: 45.262,59.817 49.655,59.817 51.177,61.339
  Bottom Layer w5: I3.1 30.607,59.817 30.607,70.866 30.734,70.993 I3.3
Net*2_4: *2.4 *3.3 C15.2 C19.1 | length 93.1
  Bottom Layer w4: v1(52.705,83.312) 40.386,83.312 40.259,83.185 40.259,65.913 v1(52.451,53.721) 52.451,45.974 59.944,38.481 75.565,38.481 82.169,45.085 v1(82.169,47.752) v1@82.169,47.879
  other v1: 79.883,57.658
Net*3_2: *3.2 *.1 C13.2 C16.1 C17.1 | length 41.9
  Top Layer w1: 77.089,78.613 78.994,80.518 C16.1 ; C17.1 91.313,59.673 91.532,59.455 91.532,61.357 C17.1@91.75,61.357
  Top Layer w4: C17.1@91.75,61.357 94.623,64.23 *.1
  Bottom Layer w4: v1(77.089,72.644) 91.186,72.644 91.313,72.771 C17.1
  other v1: 78.105,77.978 69.85,89.535
Net*3_4: *3.4 *.2 *.4 C16.2 C17.2 C18.1 | length 110.4
  Top Layer w1: C18.1 81.93,67.335 83.234,67.335 v1(83.947,67.335) 100.051,67.335 101.346,66.04 101.346,59.277 *.2 ; C16.2 v1(83.947,80.518)
  Top Layer w4: *3.4 61.417,83.134 74.66,83.134 76.362,84.836 82.804,84.836 ; v1@83.693,80.264 83.693,78.245 86.328,75.61 86.328,68.662 85.008,67.342 83.234,67.342 83.234,67.335 83.234,63.999 C17.2 95.025,52.208 95.025,49.146 98.523,49.146 *.4
Net*_10: *.10 P3.2 | length 19.8
  Bottom Layer w1: *.10 152.641,51.232 152.756,51.117 152.756,50.871 152.273,50.388 154.553,48.108 163.449,48.108 164.49,49.149 164.49,51.41 P3.2
NetC8_1: C8.1 U1.8 | length 22
  Top Layer w0.305: v1(106.299,21.971) 106.299,24.196 105.739,24.756 105.739,28.373 106.299,28.934 v1(106.299,31.496) ; C8.1 113.157,29.512 v1(113.157,30.226)
  Bottom Layer w0.305: U1.8 104.82,20.492 v1(106.299,21.971) ; v1(106.299,31.496) 111.887,31.496 v1(113.157,30.226)
NetC8_2: C8.2 I2.1 U1.2 | length 30.1
  Top Layer w0.305: v1(110.363,23.876) 110.617,23.622 v1(110.617,21.336) ; C8.2 114.382,28.575 v1(116.078,28.575)
  Top Layer w1: C8.2 114.317,27.517 115.189,26.645 117.899,26.645 122.428,22.116 I2.1
  Bottom Layer w0.305: U1.2 109.123,19.842 v1(110.617,21.336) ; v1(110.363,23.876) 111.379,23.876 v1(116.078,28.575)
NetC10_1: C10.1 U1.5 | length 11.3
  Top Layer w0.305: v1(106.68,25.146) 106.68,26.543 C10.1
  Bottom Layer w0.305: U1.5 102.743,18.542 102.743,21.209 v1(106.68,25.146)
NetR4_2: R4.2 R6.1 U1.6 | length 24.8
  Top Layer w0.508: R4.2 118.584,18.669 v1(120.142,18.669)
  Top Layer w1: R6.1 117.539,21.641 118.555,20.625 R4.2
  Bottom Layer w0.508: U1.6 105.272,19.192 106.53,17.934 115.035,17.934 117.04,19.939 118.872,19.939 v1(120.142,18.669)
NetR5_1: R5.1 U1.4 | length 26
  Top Layer w0.305: v1(112.903,21.209) 113.411,21.717 113.411,25.019 113.919,25.527 115.316,25.527 v1(115.951,24.892) ; R5.1 117.749,28.85 117.749,32.278 v1(117.856,32.385)
  Bottom Layer w0.305: U1.4 110.236,18.542 v1(112.903,21.209) ; v1(115.951,24.892) 117.856,26.797 v1(117.856,32.385)
SMB_ALERT: *.13 P3.3 | length 11.7
  Bottom Layer w1: *.13 152.273,56.61 152.273,56.388 153.289,55.372 P3.3
TRIM: *.7 P2.1 | length 29.4
  Bottom Layer w1: *.7 *.7@149.479,56.388 ; *.7@149.733,56.388 *.7@149.479,56.388 ; P2.1 161.087,45.923 147.879,45.923 147.066,46.736 146.812,46.736 146.812,52.121 147.091,52.4 147.091,55.626 147.853,56.388 *.7@149.479,56.388
VIN: *2.1 C14.1 pad.2@13.634,84.016 | length 91.3
  Top Layer w1: pad.2@13.462,83.185 13.462,83.439 13.462,84.016 pad.2@13.634,84.016 ; C14.1 44.072,72.901 44.918,73.747 v1(45.466,74.295) ; v1(69.596,47.752) 68.351,47.752 66.827,49.276 66.827,50.799 *2.1
  Top Layer w5: pad.2@13.462,83.439 14.097,84.074 37.592,84.074 40.386,81.28 40.386,73.747 44.918,73.747
  Bottom Layer w5: v1(45.466,74.295) 45.466,71.882 v1(69.596,47.752)
"VIN (-)": C12.1 C13.1 C18.2 C19.2 I3.2 pad.2@13.634,53.016 | length 72.3
  Top Layer w5: pad.2@13.081,52.578 13.64,53.009 29.718,65.405 I3.2 46.373,65.405 47.561,66.593 57.593,66.593 62.968,61.218 62.968,60.498 64.581,58.885 74.613,58.885 76.226,60.498
pads on no net: 1.9 I3.None
copper on no net:
  other v2: 160.317,10.045 161.417,10.045 162.517,10.045 160.317,11.145 161.417,11.145 162.517,11.145

## Polygon pours and split planes (outlines as drawn)
GND on Top Layer "Top Layer-No Net" (solid, pour order 4): -0.002,100.838 180.975,100.838 180.975,0 -0.002,0
GND on Bottom Layer "Bot Layer-No Net1" (solid, pour order 5): -0.002,100.838 180.975,100.838 180.975,0 -0.002,0

## Keep-outs
Keep-Out Layer:
  the board outline again, w0.254

## Other copper
Top Layer:
  rectangle net Net1_1: 156.337,17.272 158.242,17.78
  rectangle net Net*3_2: 75.184,75.438 80.772,78.994
  rectangle net Net*2_4: 81.534,48.514 87.376,56.388
  rectangle net Net*2_4: 78.994,56.515 81.153,59.436
  rectangle net Net*2_4: 80.264,45.466 87.249,51.435
  rectangle net Net*2_2: 75.692,51.816 80.645,56.261
  rectangle net Net*3_2: 75.946,75.946 80.899,81.026
  rectangle net Net*3_2: 66.04,85.471 73.787,90.932
  rectangle net Net*2_2: 65.659,63.119 74.803,75.692
  rectangle net VIN: 65.786,45.339 73.406,49.784
  rectangle net Net*2_4: 48.768,81.788 56.642,87.503
  rectangle net Net*2_4: 48.768,49.657 56.515,55.88
  rectangle net Net*3_2: 75.184,71.501 80.772,75.438
  rectangle net Net*2_3: 33.401,70.104 37.846,72.136
  rectangle net Net*2_3: 33.401,68.326 41.656,70.993
  rectangle net Net*2_3: 50.673,57.531 56.388,61.722
  rectangle net "VIN (-)": 78.994,69.596 81.153,71.12
  rectangle net "VIN (-)": 81.153,69.596 84.074,74.676
  rectangle net "VIN (-)": 75.184,63.881 80.899,69.596
  rectangle net "VIN (-)": 75.184,59.944 80.264,63.881
  region net Net*3_4: 84.645,86.36 84.645,79.375 81.471,79.375 81.471,86.36
Bottom Layer:
  rectangle net Net*2_2: 68.834,52.451 78.359,56.261
  rectangle net Net*2_2: 65.786,55.753 74.93,68.453
  rectangle net Net*2_4: 80.391,45.847 89.154,58.801
  rectangle net Net*2_4: 78.994,55.626 89.154,58.801
  rectangle net Net*3_2: 66.04,75.946 79.121,81.026
  rectangle net Net*3_2: 66.04,76.835 74.676,90.932

## Silkscreen, mask and mechanical layers (free items; w line width, h text height)
Top Overlay:
  text "VOUT (GND)" at 154.813,89.281 h1.27
  text "12V OUT" at 144.272,89.154 h1.27
  text "VIN" at 11.684,88.011 h1.27
  text "VIN (GND)" at 8.128,47.625 h1.27
  text "Underwater PDB V1.0 2017-2018 / OSU Robotics Club / Jorian Bruslind" at 1.651,13.335 h1.52
  text "1" at 82.423,12.319 h1.52
  text "2" at 84.709,12.319 h1.52
  text "3" at 87.249,12.319 h1.52
  text "4" at 89.662,12.319 h1.52
  text "4" at 82.296,7.112 h1.52
  text "3" at 84.963,7.112 h1.52
  text "2" at 87.63,7.112 h1.52
  text "1" at 90.551,7.112 h1.52
  text "VIN" at 99.06,6.985 h1.52
  text "3_3V Regulator  / (3A max)" at 102.634,1.016 h1.52
  text "5V Regulator / (5A max)" at 132.634,1.016 h1.52

## Text inside footprints (layer, text, board x,y; h text height)
*: Top Overlay "9 VOUT +" at 134.379,63.73 h1.52; Top Overlay "8 SENSE +" at 134.379,59.73 h1.52; Top Overlay "7 TRIM" at 134.379,56.23 h1.52; Top Overlay "6 SENSE -" at 134.379,52.73 h1.52; Top Overlay "5 VOUT -" at 134.379,48.73 h1.52; Top Overlay "4 VIN -" at 104.379,48.99 h1.52; Top Overlay "3 CASE" at 104.379,52.8 h1.52; Top Overlay "2 ON/OFF" at 104.379,56.61 h1.52; Top Overlay "1 VIN +" at 104.379,64.23 h1.52; Top Overlay "16 - ADDR0 / 15 - ADDR 1 / 14 - PMBCLK / 13 - SMBALERT / 12 - PMBDATA / 11 - DGND / 10 - C2" at 121.829,55.19 h0.8
P4: Top Overlay "2" at 141.373,35.179 h1.27 r270; Top Overlay "1" at 138.833,35.179 h1.27 r270; Top Overlay "15" at 138.833,13.57 h1.27 r270; Top Overlay "16" at 141.373,13.547 h1.27 r270
P5: Top Overlay "2" at 103.505,15.367 h1.27; Top Overlay "1" at 103.505,12.827 h1.27; Top Overlay "15" at 125.114,12.827 h1.27; Top Overlay "16" at 125.137,15.367 h1.27
P6: Top Overlay "9" at 133.477,85.344 h1.27 r180; Top Overlay "1" at 133.477,87.884 h1.27 r180; Top Overlay "8" at 111.125,87.884 h1.27 r180; Top Overlay "16" at 111.125,85.344 h1.27 r180